# Altium PCB PCB_Ball.PcbDoc
Units mm, origin at the board's own origin, x right, y up, seen from the top; angles counter-clockwise.
Board outline 42.4 x 41.6 mm, 2 copper layers (Top Layer, Bottom Layer), stack 1.671 mm thick; 26 components, 18 nets, 146 pads, 69 vias.
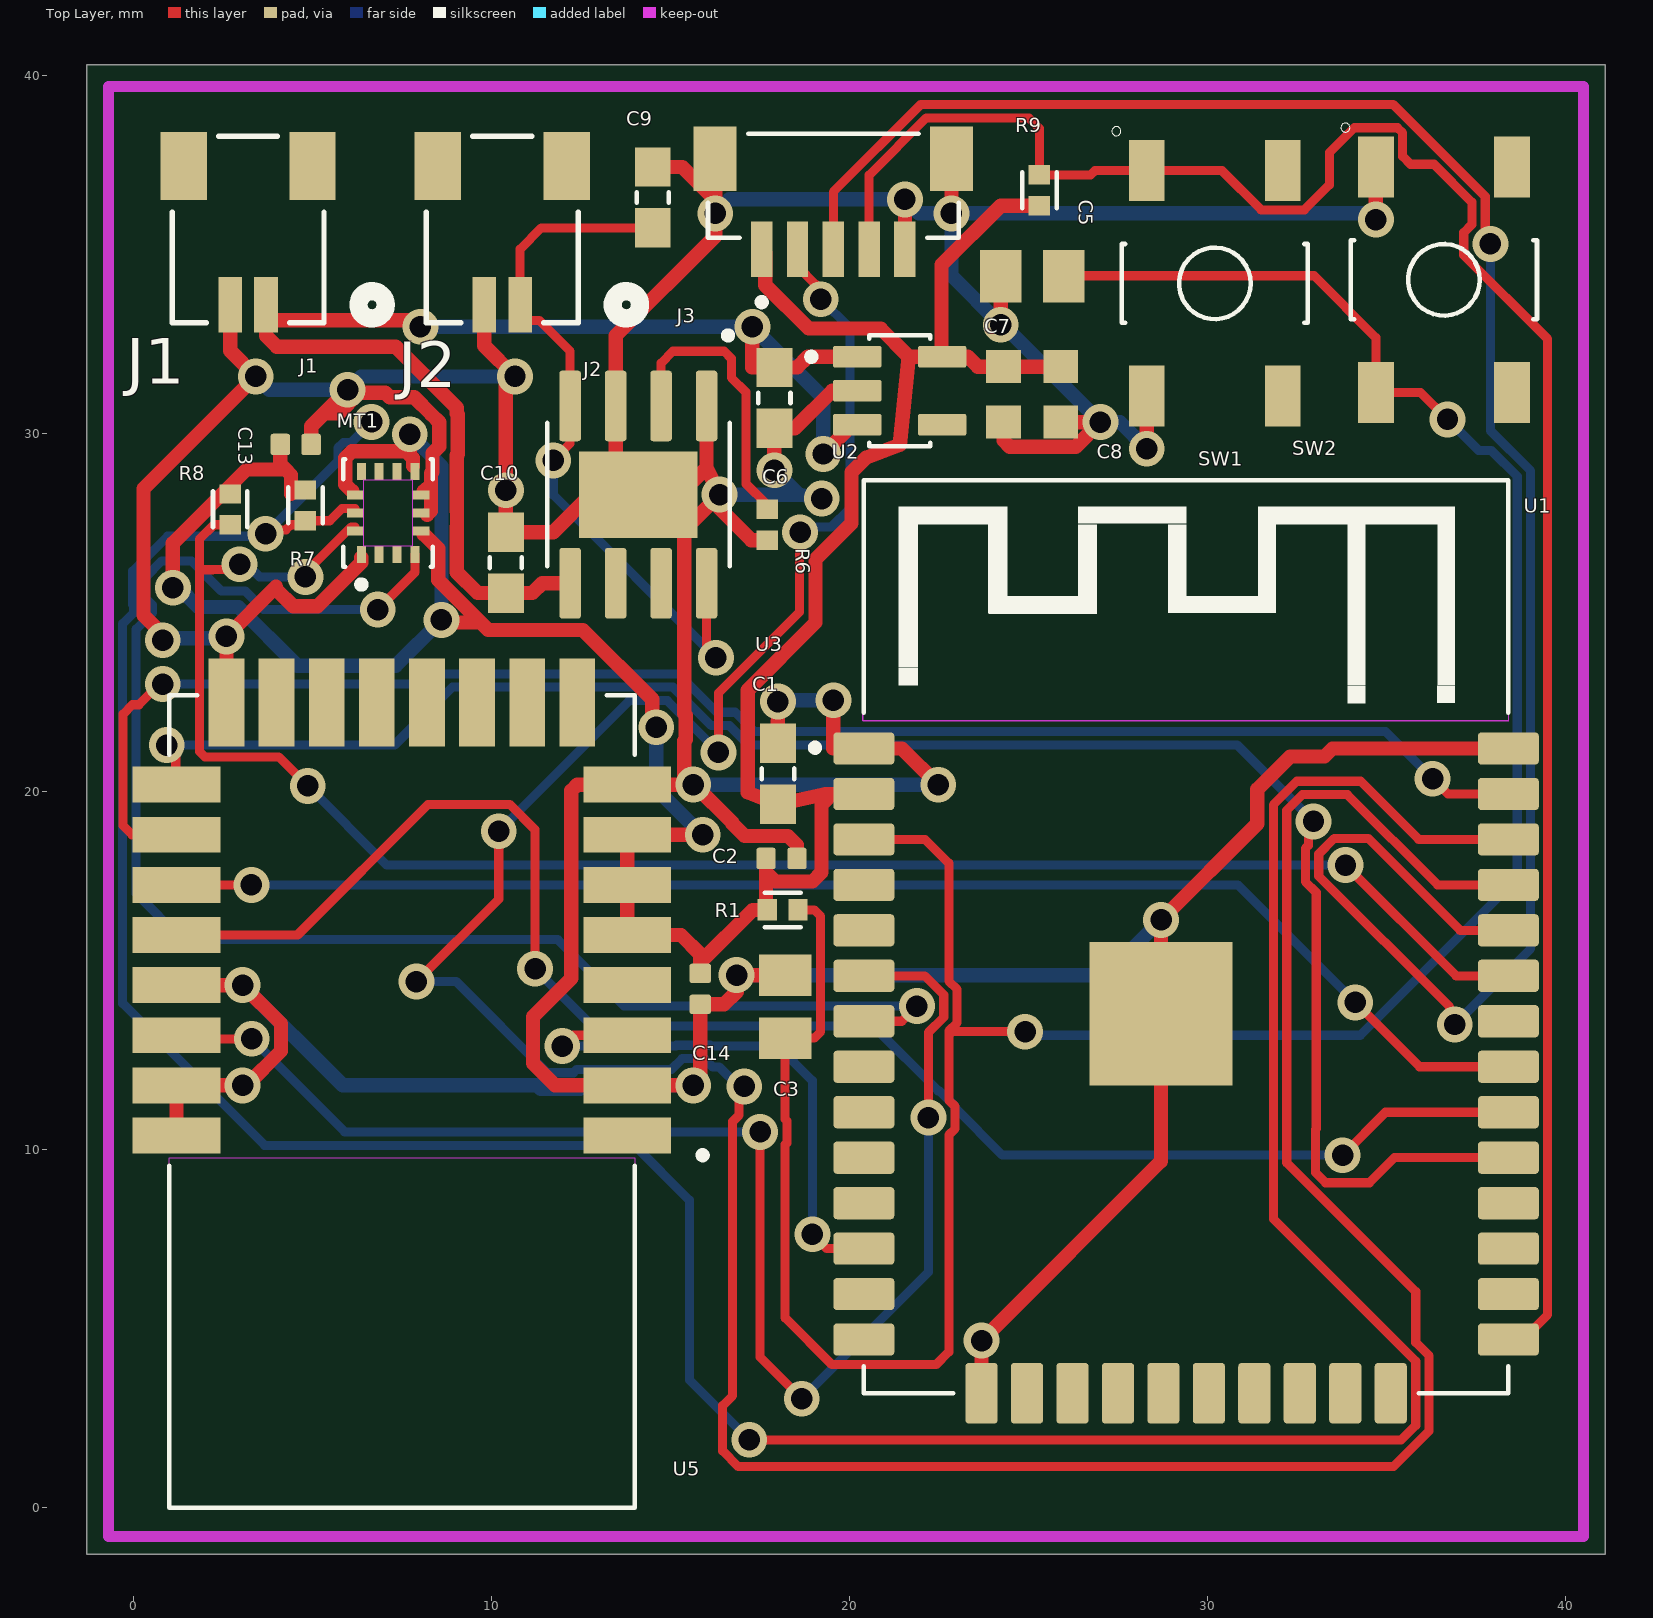
[diagram p0: Top Layer view]
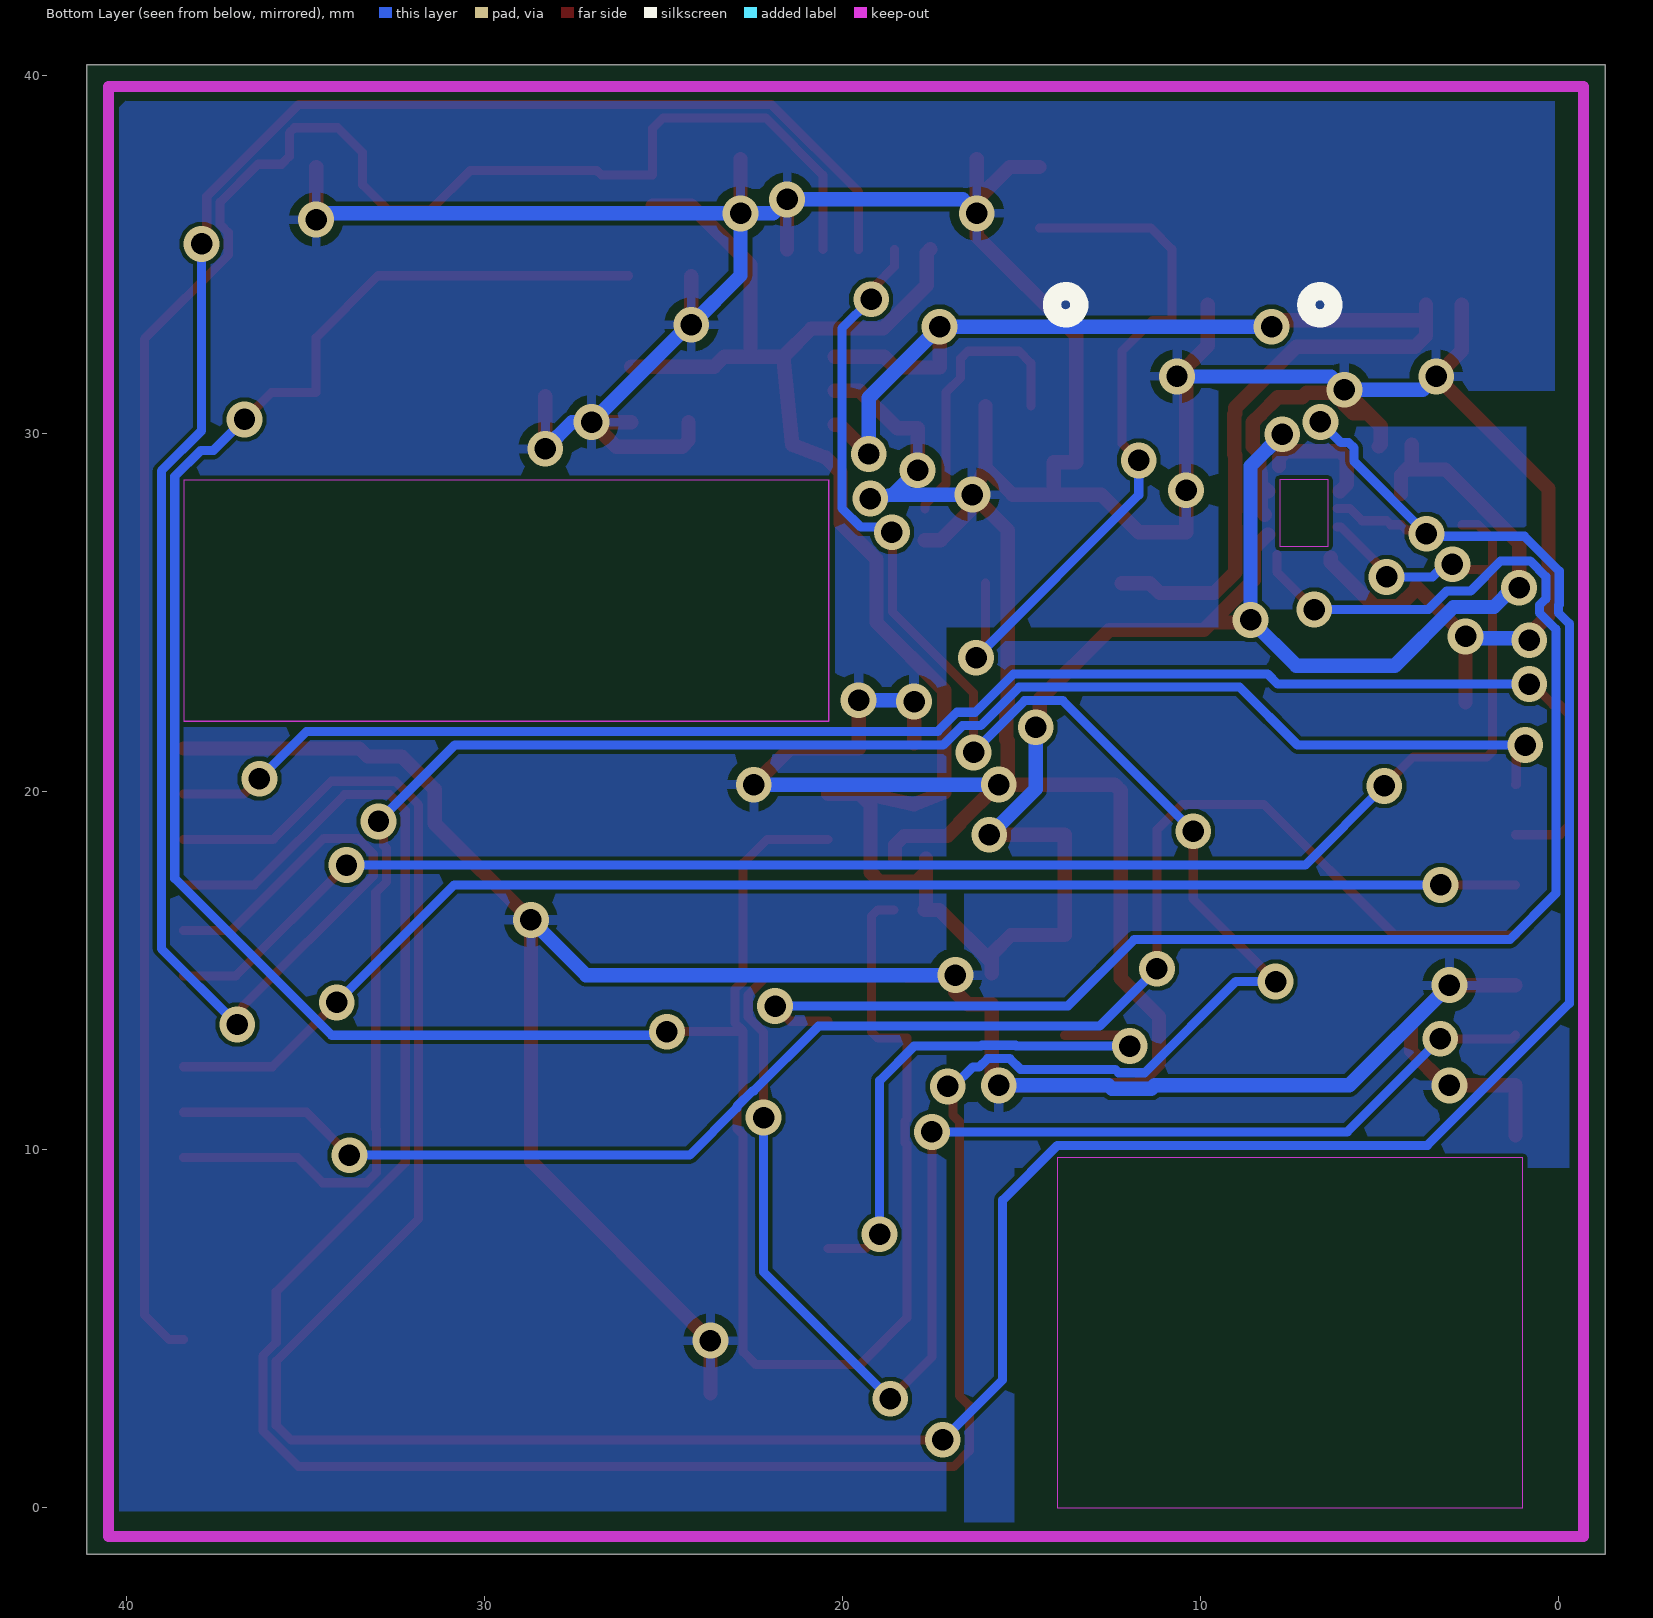
[diagram p1: Bottom Layer view, seen from below]
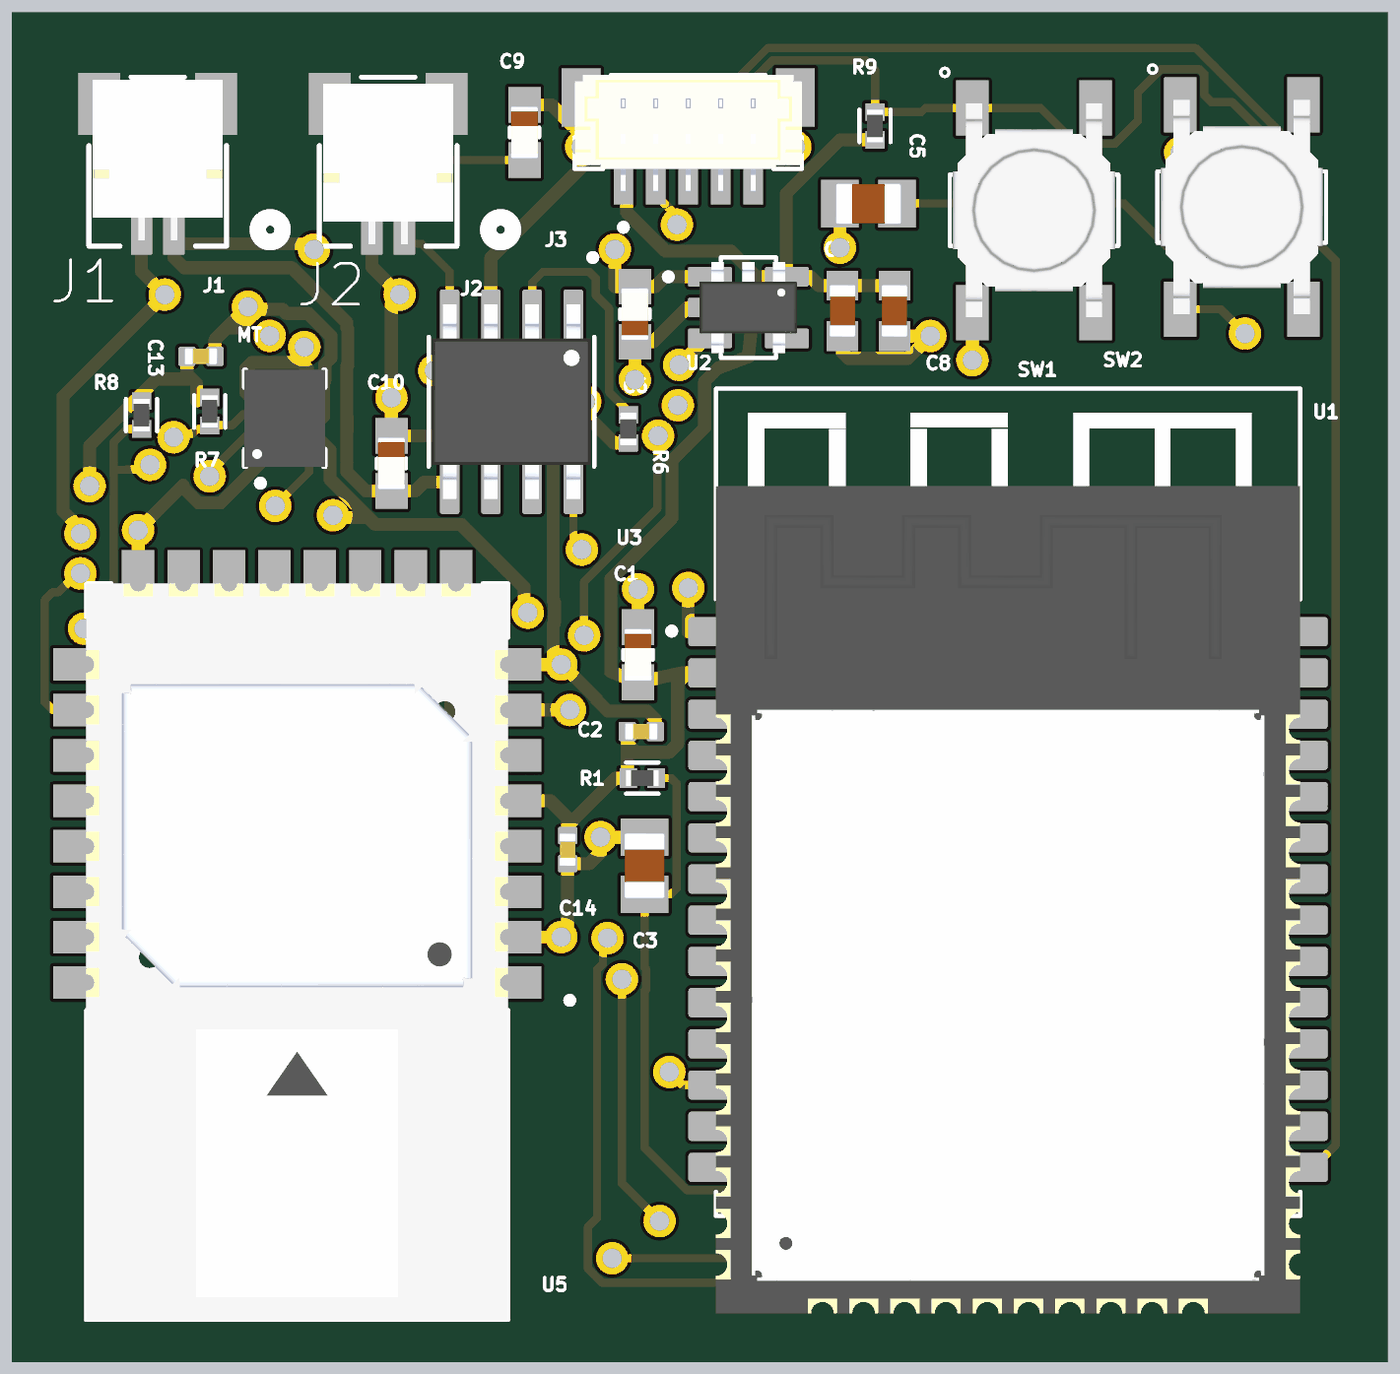
[diagram p2: 3D render of the assembled board from above, using the file's embedded part models]

## Layer stack, top to bottom
Top Solder: solder mask 0.0102, Solder Resist, Dk 3.5
Top Layer: signal copper 0.0356
Dielectric1: core 1.6, FR-4, Dk 4.8
Bottom Layer: signal copper 0.0356
Bottom Solder: solder mask 0.0102, Solder Resist, Dk 3.5

## Board outline
-1.3,-1.3 41.1,-1.3 41.1,40.3 -1.3,40.3

## Design rules (kind name [scope] priority, off if disabled: settings)
BoardOutlineClearance [All] p1: gap=0.12 ignorepadtopadclearanceinfootprint=FALSE except(0: Arc-SplitContinuation Track-SplitContinuation SMDPad-SplitContinuation THPad-SplitContinuation Via-SplitContinuation Fill-SplitContinuation Poly-SplitContinuation Region-SplitContinuation Text-SplitContinuation)
Clearance [All vs InNetClass('All Nets')] p1: gap=0.12 ignorepadtopadclearanceinfootprint=FALSE except(0: Arc-Hole Track-Hole SMDPad-Hole THPad-Hole Via-Hole Fill-Hole Poly-Hole Region-Hole Text-Hole)
DiffPairsRouting DiffPair_USB_DATADiffPairsRouting [InDifferentialPairClass('USB_DATA')] p1: maxlimit=0.254 minlimit=0.254 mostfreqgap=0.254 toplayer_minwidth=0.381 toplayer_maxwidth=1.27 toplayer_prefwidth=1.27 bottomlayer_minwidth=0.381 bottomlayer_maxwidth=1.27 bottomlayer_prefwidth=1.27 maxuncoupledlength=12.7
DiffPairsRouting [All] p2: maxlimit=0.254 minlimit=0.254 mostfreqgap=0.254 toplayer_minwidth=0.381 toplayer_maxwidth=0.381 toplayer_prefwidth=0.381 bottomlayer_minwidth=0.381 bottomlayer_maxwidth=0.381 bottomlayer_prefwidth=0.381 maxuncoupledlength=12.7
HoleSize HoleSize_1 [InPadClass('Mounting_Holes')] p1: absolutevalues=TRUE maxlimit=3 minlimit=0.025 maxpercent=80.000 minpercent=20.000
HoleSize Mounting_Holes [All] p2: absolutevalues=TRUE maxlimit=2.54 minlimit=0.025 maxpercent=80.000 minpercent=20.000
MatchedLengths DiffPair_USB_DATAMatchedLengths [InDifferentialPairClass('USB_DATA')] p1: tolerance=3.048 checknetsindiffpair=TRUE checkdiffpairvsdiffpair=FALSE checkxsignals=FALSE checkothers=FALSE
MinimumSolderMaskSliver [All] p1: minsoldermaskwidth=0
PolygonConnect [All] p1: connectstyle=Relief reliefconductorwidth=0.254 reliefentries=4 polygonreliefangle="90 Angle" airgapwidth=0.254
RoomDefinition U_ESP32_Module [InComponentClass('U_ESP32_Module')] p1: confinementstyle=ConfineIn formatcopy=TRUE lockcomponents=FALSE outline 0,39.4 0,31.096 9.448,31.096 9.448,24.5 12.331,24.501 17.02,24.502 17.02,-0.2 40.3,-0.2 40.3,39.4
RoomDefinition U_DWM3000TR13 [InComponentClass('U_DWM3000TR13')] p2: confinementstyle=ConfineIn formatcopy=TRUE lockcomponents=FALSE outline -0.5,-0.5 16.7,-0.5 16.7,24.3 -0.5,24.3
RoomDefinition U_ICM-42670-P_IMU [InComponentClass('U_ICM-42670-P_IMU')] p3: confinementstyle=ConfineIn formatcopy=TRUE lockcomponents=FALSE outline 0.8,25 9,25 9,30.289 0.8,30.289
RoutingVias [All] p1: holewidth=0.6 width=1 viastyle="Through Hole" minholewidth=0.6 minwidth=1 maxholewidth=0.711 maxwidth=1.27
ShortCircuit ShortCircuit_ADG [InNet('AGND') vs InNet('DGND')] p1 off: allowed=TRUE
ShortCircuit [All] p2: allowed=FALSE
SilkToSolderMaskClearance SilkscreenOverComponentPads [IsPad] p1 off: minsilkscreentomaskgap=0.254 clearancetoexposedcopper=TRUE
SolderMaskExpansion [All] p1: expansion=0.102 istentingtop=FALSE
SupplyNets "Schematic Supply Nets_3" [InNet('+3.3V')] p1: voltage=0.000
SupplyNets "Schematic Supply Nets_1" [InNet('GND')] p2: voltage=0.000
Width Width_Power [InNetClass('Power')] p1: maxlimit=0.6 minlimit=0.3 preferedwidth=0.4 minimp=50.000000 maximp=50.000000 favimp=50.000000
Width [All] p2: maxlimit=0.254 minlimit=0.254 preferedwidth=0.254
25 further rules are at their usual default settings.

## Classes and differential pairs
net class Power: +3.3V GND V_BAT
component class U_ICM-42670-P_IMU: C13 MT1 R7 R8
component class U_ESP32_Module: C1 C2 C3 C5 C6 C7 C8 C9 C10 J1 J2 J3 R1 R6 R9 SW1 SW2 U1 U2 U3
component class U_DWM3000TR13: C14 U5

## Components (designator, comment, footprint, x,y, rotation, side; value= is the part's Value field where it differs from the comment)
C1 "Cap" CAPC1608X90 18,20.5 r270 top value=10uF
C2 "Cap" CAPC1005X55N 18.099,18.137 r180 top value=100nF
C3 "Cap" CAPC2012X94N 18.2,14 r270 top value=0.1uF/50V(10%)
C5 "Cap" CAPC2012X94N 25.1,34.4 r0 top value=0.1uF/50V(10%)
C6 "Cap" CAPC1608X90 17.9,31 r90 top value=10uF
C7 "Cap" CAPC1608X87N 24.3,31.1 r90 top value=10nF
C8 "Cap" CAPC1608X87N 25.9,31.1 r90 top value=10nF
C9 "Cap" CAPC1608X90 14.5,36.6 r270 top value=10uF
C10 "Cap" CAPC1608X90 10.4,26.4 r270 top value=10uF
C13 "Cap" CAPC1005X55N 4.532,29.7 r180 top value=100nF
C14 "Cap" CAPC1005X55N 15.83,14.495 r90 top value=100nF
J1 "SM02B-SRSS-TB (LF)(SN)" CONN_SM02B-SRSS-TB_JST 3.2,35.7 r0 top
J2 "SM02B-SRSS-TB (LF)(SN)" CONN_SM02B-SRSS-TB_JST 10.3,35.7 r0 top
J3 "BM05B-SRSS-TB(LF)(SN)" JST_BM05B-SRSS-TB(LF)(SN) 19.545,36.925 r0 top
MT1 "ICM-42670-P" XDCR_ICM-42670-P 7.113,27.789 r90 top
R1 "Res1" RESC1005X40 18.13,16.7 r180 top value="10k (5%)"
R6 "Res1" RESC1005X40N 17.697,27.462 r90 top value=2.4k
R7 "Res1" RESC1005X40 4.8,28 r90 top value=4.7k
R8 "Res1" RESC1005X40 2.7,27.889 r90 top value=4.7k
R9 "Res1" RESC1005X40 25.3,36.8 r270 top value="10k (5%)"
SW1 "SW-PB" SW_TL3342F160QG 30.2,34.2 r270 top
SW2 "SW-PB" SW_TL3342F160QG 36.6,34.3 r270 top
U1 "ESP-WROOM-32" MODULE_ESP-WROOM-32 29.4,12.955 r0 top
U2 "AP2112K-3.3TRG1" SOT95P285X140-5N 21.4,31.2 r0 top
U3 "TP4056" SOP127P600X175-9N 14.1,28.3 r270 top
U5 "DWM3000TR13" XCVR_DWM3000TR13 7.495,11.35 r180 top

## Footprints (in the part's own frame and the unit in brackets; to place one, negate y for a bottom-side part, rotate by r counter-clockwise, add the part's x,y. Pads: shape width x height; smd on the part's side, far side on the other; paste and mask are expansions set on the pad)
CAPC1005X55N [mm]
  rrect25% 0.54x0.6 smd: 1(-0.432,0) 2(0.432,0)
  body extent -0.5,-0.25 0.5,0.25, height 0.55
CAPC1608X87N [mm]
  rect 0.92x0.97 smd: 1(-0.775,0) 2(0.775,0)
  body extent -0.8,-0.4 0.8,0.4, height 0.87
CAPC1608X90 [mm]
  rect 1.1x1 smd: 1(-0.85,0) 2(0.85,0)
  silkscreen extent -0.15,-0.45 0.15,0.45, body extent -0.8,-0.43 0.8,0.43, height 1
CAPC2012X94N [mm]
  rect 1.16x1.47 smd: 1(-0.88,0) 2(0.88,0)
  body extent -1,-0.63 1,0.63, height 0.94
CONN_SM02B-SRSS-TB_JST [mil]
  rect 26x61 smd paste+0 mask+0: 1(19.69,-82.62) 2(-19.68,-82.62)
  rect 51x75 smd paste+0 mask+0: 3(-70.87,69.94) 4(70.87,69.94)
  silkscreen extent -84,-103 151,102, body extent -79,-95 79,99, height 128
JST_BM05B-SRSS-TB(LF)(SN) [mm]
  rect 0.6x1.55 smd: 1(-2,-1.775) 2(-1,-1.775) 3(0,-1.775) 4(1,-1.775) 5(2,-1.775)
  rect 1.2x1.8 smd: S1(-3.3,0.75) S2(3.3,0.75)
  silkscreen extent -3.5,-3.35 3.5,1.45, body extent -3.5,-2.15 3.5,1.45, height 4.25
MODULE_ESP-WROOM-32 [mm]
  rrect22% 1.7x0.9 smd: 1(-9,8.255) 2(-9,6.985) 3(-9,5.715) 4(-9,4.445) 5(-9,3.175) 6(-9,1.905) 7(-9,0.635) 8(-9,-0.635) 9(-9,-1.905) 10(-9,-3.175) 11(-9,-4.445) 12(-9,-5.715) 13(-9,-6.985) 14(-9,-8.255) 25(9,-8.255) 26(9,-6.985) 27(9,-5.715) 28(9,-4.445) 29(9,-3.175) 30(9,-1.905) 31(9,-0.635) 32(9,0.635) 33(9,1.905) 34(9,3.175) 35(9,4.445) 36(9,5.715) 37(9,6.985) 38(9,8.255)
  rect 4x4 smd: 1.1(-0.7,0.845)
  rrect22% 0.9x1.7 smd: 15(-5.715,-9.755) 16(-4.445,-9.755) 17(-3.175,-9.755) 18(-1.905,-9.755) 19(-0.635,-9.755) 20(0.635,-9.755) 21(1.905,-9.755) 22(3.175,-9.755) 23(4.445,-9.755) 24(5.715,-9.755)
  Keep-Out Layer region: 9,9.026 -9.026,9.026 -9.026,15.75 9,15.75
  Keep-Out Layer region: 9,9.012 -9.012,9.012 -9.012,15.75 9,15.75
  silkscreen extent -10.46,-9.75 9,15.75, body extent -9,-12.75 9,12.75, height 3.25
RESC1005X40 [mm]
  rect 0.54x0.6 smd: 1(-0.43,0) 2(0.43,0)
  silkscreen extent -0.5,-0.48 0.5,0.48, body extent -0.5,-0.25 0.5,0.25, height 0.4
RESC1005X40N [mm]
  rect 0.54x0.6 smd: 1(-0.432,0) 2(0.432,0)
  body extent -0.5,-0.25 0.5,0.25, height 0.4
SOP127P600X175-9N [mm]
  rrect25% 1.97x0.6 smd: 1(-2.475,1.905) 2(-2.475,0.635) 3(-2.475,-0.635) 4(-2.475,-1.905) 5(2.475,-1.905) 6(2.475,-0.635) 7(2.475,0.635) 8(2.475,1.905)
  rect 2.413x3.302 smd paste-3: 9(0,0)
  silkscreen extent -4.54,-2.55 2,2.6, body extent -3,-2.45 3,2.45, height 1.75
SOT95P285X140-5N [mm]
  rrect15% 1.35x0.6 smd: 1(-1.185,0.95) 2(-1.185,0) 3(-1.185,-0.95) 4(1.185,-0.95) 5(1.185,0.95)
  silkscreen extent -2.57,-1.55 0.85,1.55, body extent -1.5,-1.4 1.5,1.4, height 1.4
SW_TL3342F160QG [mm]
  rect 1.7x1 smd paste+0 mask+0.102: 1(-3.15,-1.9) 2(3.15,-1.9) 3(-3.15,1.9) 4(3.15,1.9)
  silkscreen extent -4.38,-2.88 1.1,2.6, body extent -3.3,-2.5 3.3,2.5, height 1.46
XCVR_DWM3000TR13 [mm]
  rect 2.45x1 smd: 1(-6.295,0.95) 2(-6.295,-0.45) 3(-6.295,-1.85) 4(-6.295,-3.25) 5(-6.295,-4.65) 6(-6.295,-6.05) 7(-6.295,-7.45) 8(-6.295,-8.85) 17(6.295,-8.85) 18(6.295,-7.45) 19(6.295,-6.05) 20(6.295,-4.65) 21(6.295,-3.25) 22(6.295,-1.85) 23(6.295,-0.45) 24(6.295,0.95)
  rect 1x2.45 smd: 9(-4.9,-11.145) 10(-3.5,-11.145) 11(-2.1,-11.145) 12(-0.7,-11.145) 13(0.7,-11.145) 14(2.1,-11.145) 15(3.5,-11.145) 16(4.9,-11.145)
  Keep-Out Layer region: 6.5,1.575 -6.5,1.575 -6.5,11.35 6.5,11.35
  Keep-Out Layer region: 6.5,1.575 -6.5,1.575 -6.5,11.35 6.5,11.35
  silkscreen extent -8.5,-11.35 6.5,11.35, body extent -6.5,-11.35 6.5,11.35, height 2.89
XDCR_ICM-42670-P [mm]
  rect 0.475x0.25 smd paste-1 mask+0.05: 1(-1.163,0.75) 2(-1.163,0.25) 3(-1.163,-0.25) 4(-1.163,-0.75) 8(1.162,-0.75) 9(1.162,-0.25) 10(1.162,0.25) 11(1.162,0.75)
  rect 0.25x0.475 smd paste-1 mask+0.05: 5(-0.5,-0.913) 6(0,-0.913) 7(0.5,-0.913) 12(0.5,0.913) 13(0,0.913) 14(-0.5,0.913)
  Keep-Out Layer region: 0.925,-0.675 -0.925,-0.675 -0.925,0.675 0.925,0.675
  silkscreen extent -2.1,-1.25 1.5,1.25, body extent -1.5,-1.25 1.5,1.25, height 0.81

## Part data
C1 C2 C3 C5 C6 C7 C8 C9 C10 C13 C14: "Capacitor", LatestRevisionDate=17-Jul-2002, LatestRevisionNote="Re-released for DXP Platform.", PackageDescription="Radial Cap, Thru-Hole; 2 Leads; 0.3 in Pin Spacing", PackageReference=RAD-0.3, Published=8-Jun-2000, Publisher="Altium Limited"
J1 J2: library part "SM02B-SRSS-TB LFSN", "Description", Manufacturer_Name=JST, Copyright="Copyright (C) 2026 Ultra Librarian. All rights reserved.", Manufacturer_Part_Number="SM02B-SRSS-TB (LF)(SN)", RefDes=RefDes, Type=Type
J3 MT1: Package=None, Availability=Unavailable, Price=None
  J3: MP=BM05B-SRSS-TB(LF)(SN)
  MT1: MP=ICM-42670-P
R1 R6 R7 R8 R9: "Resistor", LatestRevisionDate=17-Jul-2002, LatestRevisionNote="Re-released for DXP Platform.", PackageDescription="Axial Device, Thru-Hole; 2 Leads; 0.3 in Pin Spacing", PackageReference=AXIAL-0.3, Published=8-Jun-2000, Publisher="Altium Limited"
SW1 SW2: "Switch", LatestRevisionDate=17-Jul-2002, LatestRevisionNote="Re-released for DXP Platform.", PackageDescription="Switch; 2 Leads", PackageReference=SPST-2, Published=24-Mar-1999, Publisher="Altium Limited"
U1: "Transceptor serie ESP-WROOM-32; Placa de evaluaciÃ³n 802.11 b/g/n (Wi-Fi, WiFi, WLAN), BluetoothÂ® Smart 4.x de bajo consumo (BLE)", Package="Module Espressif Systems", Check_prices=https://www.snapeda.com/parts/ESP-WROOM-32/Espressif+Systems/view-part/?ref=eda, MF="Espressif Systems", MP=ESP-WROOM-32, SnapEDA_Link=https://www.snapeda.com/parts/ESP-WROOM-32/Espressif+Systems/view-part/?ref=snap
U2: "Linear Voltage Regulator IC Positive Fixed 1 Output 600mA SOT-25", Package="SOT-753 Diodes Inc.", Availability="In Stock", Check_prices=https://www.snapeda.com/parts/AP2112K-3.3TRG1/Diodes+Inc./view-part/?ref=eda, MF="Diodes Inc.", MP=AP2112K-3.3TRG1, Price=None, Purchase-URL=https://pricing.snapeda.com/search/part/AP2112K-3.3TRG1/?ref=eda, SnapEDA_Link=https://www.snapeda.com/parts/AP2112K-3.3TRG1/Diodes+Inc./view-part/?ref=snap
U3: "Complete single cell Li-Ion battery with a constant current / constant voltage linear charger", Package=Package, Availability="Not in stock", Check_prices=https://www.snapeda.com/parts/TP4056/NanJing+Top+Power+ASIC+Corp./view-part/?ref=eda, MF="NanJing Top Power ASIC Corp.", MP=TP4056, Price=None, SnapEDA_Link=https://www.snapeda.com/parts/TP4056/NanJing+Top+Power+ASIC+Corp./view-part/?ref=snap
U5: "802.15.4, Bluetooth, Cellular UWB, ZigbeeÂ® Transceiver Module 6.25GHz ~ 8.25GHz Integrated, Ceramic Patch Surface Mount", Package=None, Check_prices=https://www.snapeda.com/parts/DWM3000TR13/Qorvo/view-part/?ref=eda, MF=Qorvo, MP=DWM3000TR13, SnapEDA_Link=https://www.snapeda.com/parts/DWM3000TR13/Qorvo/view-part/?ref=snap

## Via types
v1: diameter 1, hole 0.6, Top Layer to Bottom Layer, 69 vias

## Nets (pads, with @x,y where several pads share a name; then routed paths per layer and width w, separated by ;. In a path a pad name is that pad's centre, name@x,y a point inside that pad or via, vN(x,y) a via of type N, cw(c..) or ccw(c..) an arc to the next point about the centre after c; other vN are vias at no path point)
+3.3V: C1.2 C2.2 C7.2 C8.2 C13.2 C14.2 J3.1 MT1.5 MT1.8 MT1.12 R1.2 R7.2 R8.2 R9.2 U1.2 U2.5 U5.5 U5.6 U5.7 | length 88.9
  Top Layer w0.4: v1(1.1,25.7) 1.1,26.943 3.157,29 4.25,29 ; C13.2 4.1,29.15 4.25,29 ; 4.4,28.319 4.4,28.85 4.25,29 ; MT1.12@6.118,28.394 6.105,28.394 5.917,28.581 5.917,29.321 6.105,29.509 6.62,29.509 7.62,29.509 7.714,29.415 ; v1(7.716,29.984) 7.714,29.982 7.714,29.415 ; MT1.8@7.807,29.1 7.807,29.321 7.714,29.415 ; MT1.5@8.108,27.184 8.12,27.184 8.51,26.794 8.51,25.917 9.7,24.726 ; v1(8.6,24.8) 8.674,24.726 9.7,24.726 ; v1(14.6,21.8) 14.485,21.915 14.485,22.582 12.548,24.52 9.906,24.52 9.7,24.726 ; C14.2 15.83,15.235 ; v1(15.9,18.8) U5.7 U5.6 U5.5 15.294,16 15.83,15.464 15.83,15.235 ; J3.1 17.645,35.05 17.645,34.149 18.857,32.937 20.866,32.937 21.654,32.15 ; C2.2 17.667,17.75 ; R1.2 R1.2@17.667,16.7 ; U1.2 19.52,19.94 ; R9.2 24.221,36.37 22.568,34.717 U2.5@22.568,32.15 ; C8.2 25.083,31.875 C7.2 23.58,31.875 23.305,32.15 U2.5 U2.5@22.568,32.15 ; 15.83,15.235 17.294,16.7 R1.2@17.667,16.7 ; R1.2@17.667,16.7 17.667,17.75 ; 17.667,17.75 17.921,17.496 18.961,17.496 19.215,17.75 19.215,19.635 19.52,19.94 ; 19.52,19.94 19.327,19.94 C1.2 17.158,19.98 17.158,22.837 19.047,24.727 19.047,26.497 20.053,27.504 20.053,28.926 20.46,29.332 21.4,29.688 21.654,32.15 ; 21.654,32.15 U2.5@22.568,32.15
  Bottom Layer w0.4: v1(1.1,25.7) 1.262,25.7 1.802,25.16 2.935,25.16 4.575,23.52 7.32,23.52 v1(8.6,24.8) 8.6,29.1 v1(7.716,29.984) ; v1(14.6,21.8) 14.6,20.075 15.875,18.8 v1(15.9,18.8)
EN: C3.2 C5.2 R1.1 SW2.2 U1.3 | length 79.6
  Top Layer w0.254: C3.2 18.199,10.857 18.247,10.809 18.247,10.191 18.199,10.143 18.199,5.309 19.506,4.003 22.42,4.003 22.771,4.354 22.771,10.415 22.947,10.591 22.947,11.209 22.771,11.385 22.771,13.2 ; C3.2 19.012,13.12 19.19,13.298 19.19,16.522 19.012,16.7 R1.1 ; U1.3 22.105,18.67 22.771,18.004 22.771,14.713 23.003,14.481 23.003,13.552 22.771,13.32 22.771,13.3 22.771,13.2 ; v1(24.9,13.3) 22.871,13.3 22.771,13.2 ; C5.2 25.98,34.412 32.973,34.412 34.7,32.685 SW2.2 35.95,31.15 v1(36.7,30.4)
  Bottom Layer w0.254: v1(24.9,13.3) 25,13.2 34.264,13.2 38.647,17.583 38.647,28.807 37.922,29.532 37.568,29.532 v1(36.7,30.4)
GND: C1.1 C2.1 C3.1 C5.1 C6.1 C7.1 C8.1 C9.1 C10.1 C13.1 C14.1 J1.2 J2.2 J3.5 J3.S1 J3.S2 MT1.1 MT1.6 MT1.7 R6.1 SW1.2 SW2.1 U1.1 U1.1.1 U1.15 U1.38 U2.2 U3.1 U3.3 U3.9 U5.2 U5.8 U5.16 U5.21 U5.23 U5.24 | length 226.5
  Top Layer w0.4: v1(0.818,24.23) 0.818,24.392 0.28,24.93 0.28,28.464 v1(3.416,31.601) 2.7,32.317 J1.2 ; U5.24 U5.23 3.16,11.8 4.12,12.76 4.12,13.525 v1(3.045,14.6) U5.21 ; U5.16 v1(2.595,24.34) 3.98,25.725 3.98,25.66 4.46,25.18 5.14,25.18 6.362,26.403 MT1.1@6.362,26.544 ; C13.1@5.02,29.644 C13.1 4.964,30.21 5.327,30.573 ; v1(5.98,31.226) 5.327,30.573 ; MT1.7@8.108,28.394 8.12,28.394 8.308,28.581 ; MT1.6@8.2,27.734 8.308,27.841 8.308,28.581 ; J2.2 9.8,32.456 v1(10.655,31.601) 10.4,31.345 v1(10.4,28.42) C10.1 11.722,27.25 12.772,28.3 U3.9 ; C9.1 15.329,37.45 v1@16.245,36.534 ; U3.1 16.005,29.053 ; J3.S1 v1@16.245,36.534 ; R6.1 17.251,27.03 16.371,27.91 v1(16.371,28.3) ; v1(17.9,28.98) C6.1 18.47,30.15 19.52,31.2 U2.2 ; C1.1 17.996,21.35 17.996,21.966 18,21.97 v1(18,22.52) ; C3.1 v1(16.845,14.88) 16.845,14.415 16.494,14.063 C14.1 15.83,11.995 v1(15.635,11.8) U5.2 11.772,11.8 11.156,12.416 11.156,13.719 12.23,14.793 12.23,20.036 12.394,20.2 U5.8 v1(15.635,20.2) ; C2.1 18.531,18.512 18.277,18.766 17.069,18.766 16.72,19.115 16.72,19.14 15.66,20.2 v1(15.635,20.2) ; v1(19.547,22.559) 19.547,21.21 U1.1 21.46,21.21 v1(22.476,20.194) ; J3.5 v1(21.545,36.545) ; v1(22.845,36.155) J3.S2 ; U1.15 v1(23.685,4.67) 28.7,9.685 U1.1.1 v1(28.7,16.42) 31.389,19.109 31.389,20.066 32.308,20.985 33.265,20.985 33.49,21.21 U1.38 ; v1(24.22,33.045) C5.1 ; C7.1 24.3,29.81 24.473,29.637 26.317,29.637 v1(27.005,30.325) 26.456,30.325 26.454,30.323 25.9,30.323 C8.1 ; v1(28.3,29.58) SW1.2 ; v1(34.7,35.98) SW2.1 ; 5.327,30.573 5.735,30.573 6.31,31.149 7.032,31.149 7.16,31.02 7.84,31.02 8.32,30.54 8.536,30.324 8.536,29.645 8.349,29.458 8.349,28.938 8.308,28.897 8.308,28.581 ; U3.9 15.252,28.3 16.005,29.053 ; U3.9 14.1,29.205 13.465,29.205 U3.3 13.465,32.736 16.245,35.516 v1(16.245,36.155) v1@16.245,36.534 ; v1(15.635,20.2) 15.38,20.455 15.38,21.42 15.42,21.46 15.42,22.14 15.38,22.18 15.38,27.309 v1(16.371,28.3) ; 16.005,29.053 v1(16.371,28.3)
  Bottom Layer w0.4: v1(0.818,24.23) 0.873,24.285 2.54,24.285 v1(2.595,24.34) ; v1(3.045,14.6) 5.845,11.8 11.28,11.8 11.375,11.705 12.471,11.705 12.566,11.8 v1(15.635,11.8) ; v1(3.416,31.601) 3.791,31.226 v1(5.98,31.226) 6.354,31.601 v1(10.655,31.601) ; v1(15.635,20.2) 22.47,20.2 v1(22.476,20.194) ; v1(16.245,36.155) 16.636,36.545 v1(21.545,36.545) 21.936,36.155 v1(22.845,36.155) ; v1(16.371,28.3) 18.58,28.3 ; v1(16.845,14.88) 27.16,14.88 v1(28.7,16.42) ; v1(17.9,28.98) 18.58,28.3 ; v1(18,22.52) 18.039,22.559 v1(19.547,22.559) ; v1(19.223,28.189) 18.58,28.3 ; v1(28.3,29.58) 27.555,30.325 v1(27.005,30.325) 24.285,33.045 v1(24.22,33.045) 22.845,34.42 v1(22.845,36.155) ; v1(34.7,35.98) 34.525,36.155 v1(22.845,36.155)
  other v1: 3.045,11.8
IO0: J3.4 R9.1 SW1.1 U1.25 | length 57.7
  Top Layer w0.254: J3.4 20.545,37.225 22.143,38.822 25.007,38.822 25.3,38.529 R9.1 26.734,37.23 26.854,37.35 SW1.1 30.401,37.35 31.498,36.253 32.702,36.253 33.4,36.951 33.4,37.849 34.098,38.547 35.302,38.547 35.447,38.402 35.447,37.745 35.666,37.526 36.323,37.526 37.379,36.47 37.379,35.843 37.153,35.617 37.153,34.991 39.497,32.647 39.497,5.397 38.8,4.7 U1.25
NetC9_2: C9.2 J2.1 U3.4 U3.8 | length 20.5
  Top Layer w0.254: v1(11.722,29.256) 12.195,29.729 U3.4 12.195,32.304 11.331,33.168 10.8,33.168 J2.1 10.8,35.158 11.392,35.75 C9.2 ; U3.8 16.005,24.008 v1(16.269,23.744)
  Bottom Layer w0.254: v1(11.722,29.256) 11.722,28.291 v1(16.269,23.744)
NetMT1_4: MT1.4 U1.7 | length 43.1
  Top Layer w0.254: v1(6.821,25.091) 7.863,26.132 MT1.4 ; U1.7 21.456,13.59 v1(21.882,14.016)
  Bottom Layer w0.254: v1(6.821,25.091) 3.636,25.091 3.12,25.607 2.456,25.607 1.616,26.447 0.791,26.447 0.353,26.009 0.353,25.391 0.532,25.211 0.532,25.001 0.071,24.539 0.071,17.158 1.359,15.87 11.849,15.87 13.703,14.016 v1(21.882,14.016)
NetMT1_13: MT1.13 R7.1 U1.36 | length 94.6
  Top Layer w0.254: v1(3.688,27.207) 3.761,27.28 3.98,27.28 4.016,27.316 4.257,27.316 4.4,27.459 4.689,27.459 R7.1 5.481,27.57 5.828,27.917 6.191,27.917 ; v1@6.448,30.329 v1(6.65,30.329) ; v1(17.2,1.9) 35.406,1.9 35.812,2.306 35.812,4.094 31.836,8.07 31.836,19.636 32.493,20.293 34.273,20.293 35.896,18.67 U1.36
  Bottom Layer w0.254: v1(6.65,30.329) 6.074,29.753 5.86,29.753 5.711,29.604 5.711,29.231 v1(3.688,27.207) 3.618,27.137 0.952,27.137 -0.021,26.164 -0.021,25.236 0.004,25.211 0.004,25.001 -0.303,24.694 -0.303,14.092 3.663,10.126 13.993,10.126 15.525,8.594 15.525,3.575 v1(17.2,1.9)
NetMT1_14: MT1.14 R8.1 U1.33 | length 51.3
  Top Layer w0.254: R8.1 2.248,27.459 1.842,27.052 1.842,26.2 ; v1(2.962,26.354) 2.82,26.211 2.22,26.211 2.208,26.2 1.842,26.2 ; v1(4.8,26) 4.8,26.117 6.083,27.4 MT1.14@6.191,27.4 ; v1(4.864,20.163) 4.051,20.976 1.994,20.976 1.842,21.128 1.842,25.385 1.847,25.391 1.847,26.009 1.842,26.015 1.842,26.2 ; v1(33.851,17.953) 36.944,14.86 U1.33
  Bottom Layer w0.254: v1(2.962,26.354) 3.164,26.354 3.518,26 v1(4.8,26) ; v1(4.864,20.163) 7.074,17.953 v1(33.851,17.953)
NetR6_2: R6.2 U3.2 | length 8
  Top Layer w0.254: U3.2 14.735,31.974 15.065,32.304 16.497,32.304 16.701,32.101 16.701,31.568 17.107,31.161 17.107,28.602 17.697,28.012 R6.2
NetU1_6: U1.6 U5.22 | length 40.7
  Top Layer w0.254: U5.22 1.3,13.1 v1(3.3,13.1) ; v1(17.5,10.5) 17.5,4.21 v1(18.663,3.048) ; U1.6 22.095,14.86 22.629,14.326 22.629,13.707 22.2,13.278 v1(22.2,10.9)
  Bottom Layer w0.254: v1(3.3,13.1) 5.9,10.5 v1(17.5,10.5) ; v1(18.663,3.048) 22.2,6.585 v1(22.2,10.9)
NetU1_12: U1.12 U5.3 | length 15.2
  Top Layer w0.254: v1(11.976,12.899) 12.278,13.2 U5.3 ; v1(18.961,7.641) 19.362,7.24 U1.12
  Bottom Layer w0.254: v1(11.976,12.899) 15.148,12.899 15.171,12.921 16.099,12.921 16.122,12.899 17.996,12.899 18.961,11.933 v1(18.961,7.641)
NetU1_29: U1.29 U5.17 | length 51.3
  Top Layer w0.254: v1(0.927,21.306) 1.181,21.052 1.181,20.2 U5.17 ; v1(32.957,19.172) 32.814,19.029 32.814,18.502 32.73,18.418 32.73,17.489 33.033,17.186 33.033,10.597 33.01,10.575 33.01,9.368 33.297,9.081 34.516,9.081 35.216,9.78 U1.29
  Bottom Layer w0.254: v1(0.927,21.306) 7.289,21.306 8.904,22.921 15.064,22.921 16.138,21.847 16.647,21.847 17.188,21.306 30.823,21.306 v1(32.957,19.172)
NetU1_30: U1.30 U5.20 | length 45.6
  Top Layer w0.254: U5.20 4.58,16 8.227,19.647 10.509,19.647 11.214,18.942 v1(11.214,15.058) ; v1(33.769,9.851) 34.969,11.05 U1.30
  Bottom Layer w0.254: v1(11.214,15.058) 12.814,13.457 20.663,13.457 22.473,11.647 22.509,11.647 22.947,11.209 22.947,11.173 24.27,9.851 v1(33.769,9.851)
NetU1_31: U1.31 U5.19 | length 39.3
  Top Layer w0.254: U5.19 v1(3.295,17.4) ; v1(34.125,14.118) 35.923,12.32 U1.31
  Bottom Layer w0.254: v1(3.295,17.4) 30.843,17.4 v1(34.125,14.118)
NetU1_37: U1.37 U5.18 | length 45.3
  Top Layer w0.254: v1(0.818,23.008) 0.726,23.008 0.149,22.431 -0.031,22.431 -0.292,22.17 -0.292,19.054 -0.038,18.8 U5.18 ; v1(36.284,20.366) 36.71,19.94 U1.37
  Bottom Layer w0.254: v1(0.818,23.008) 7.84,23.008 8.127,23.295 15.219,23.295 16.293,22.221 16.802,22.221 17.336,21.687 34.963,21.687 v1(36.284,20.366)
RXD0: J3.3 U1.34 | length 59.3
  Top Layer w0.254: J3.3 19.545,36.754 21.988,39.196 35.182,39.196 37.753,36.625 37.753,35.649 37.9,35.502 v1(37.9,35.3) ; v1(36.9,13.5) 36.757,13.643 36.757,13.991 33.104,17.644 33.104,18.263 33.542,18.7 34.486,18.7 37.056,16.13 U1.34
  Bottom Layer w0.254: v1(36.9,13.5) 39.021,15.621 39.021,28.962 37.9,30.083 v1(37.9,35.3)
TXD0: J3.2 U1.35 | length 97.9
  Top Layer w0.254: v1(7.9,14.7) 10.2,17 v1(10.2,18.9) ; v1(16.338,21.1) 16.338,22.757 18.6,25.019 18.6,27.231 v1(18.617,27.248) ; v1(17.06,11.77) 16.917,11.627 16.917,10.973 16.734,10.79 16.734,3.136 16.453,2.855 16.453,1.591 16.891,1.153 35.188,1.153 36.186,2.151 36.186,4.249 35.812,4.623 35.812,6.037 32.21,9.639 32.21,19.481 32.648,19.919 33.903,19.919 36.422,17.4 U1.35 ; J3.2 18.545,34.675 19.054,34.167 19.054,33.9 v1(19.197,33.757)
  Bottom Layer w0.254: v1(7.9,14.7) 9.012,14.7 11.56,12.152 12.286,12.152 12.381,12.247 15.026,12.247 15.326,12.547 15.944,12.547 16.178,12.314 16.358,12.314 16.901,11.77 v1(17.06,11.77) ; v1(10.2,18.9) 13.847,22.547 14.909,22.547 16.338,21.119 v1(16.338,21.1) ; v1(18.617,27.248) 18.76,27.39 19.481,27.39 20.013,27.923 20.013,32.941 v1(19.197,33.757)
V_BAT: C6.2 C10.2 J1.1 U2.1 U2.3 U3.5 | length 38.7
  Top Layer w0.4: J1.1 J1.1@3.7,33.168 ; v1(8.014,32.99) 7.836,33.168 J1.1@3.7,33.168 ; U3.5 11.413,25.825 11.138,25.55 C10.2 9.612,25.55 9.03,26.132 9.03,27.394 9.034,27.399 9.034,27.83 9.03,27.834 9.03,29.403 9.056,29.429 9.056,30.539 9.03,30.565 9.03,30.729 7.328,32.431 4.005,32.431 3.7,32.736 J1.1@3.7,33.168 ; v1(17.285,32.99) 17.285,31.85 C6.2 18.534,31.85 18.834,32.15 U2.1 ; v1(19.266,29.434) 20.082,30.25 U2.3
  Bottom Layer w0.4: v1(8.014,32.99) v1(17.285,32.99) 19.266,31.009 v1(19.266,29.434)
pads on no net: J1.3 J1.4 J2.3 J2.4 MT1.2 MT1.3 MT1.9 MT1.10 MT1.11 SW1.3 SW1.4 SW2.3 SW2.4 U1.4 U1.5 U1.8 U1.9 U1.10 U1.11 U1.13 U1.14 U1.16 U1.17 U1.18 U1.19 U1.20 U1.21 U1.22 U1.23 U1.24 U1.26 U1.27 U1.28 U1.32 U2.4 U3.6 U3.7 U5.1 U5.4 U5.9 U5.10 U5.11 U5.12 U5.13 U5.14 U5.15

## Polygon pours and split planes (outlines as drawn)
GND on Bottom Layer "GND_L02_P002" (solid, pour order 2): -0.4,24.2 -0.3,24.1 -0.3,-0.4 16.6,-0.4 16.6,24.2
GND on Bottom Layer "GND_L02_P001" (solid, pour order 1): 0.9,30.2 0.9,25.1 8.9,25.1 8.9,30.2
GND on Bottom Layer "GND_L02_P000" (solid, pour order 0): 0.104,39.287 0.1,39.283 0.1,31.2 9.5,31.2 9.5,24.6 17.1,24.6 17.1,-0.1 40.2,-0.1 40.2,39.3

## Keep-outs
Keep-Out Layer:
  lines w0.3: -0.7,-0.8 40.5,-0.8 40.5,39.7 -0.7,39.7 -0.7,-0.8

## Other copper
Multi-Layer:
  pour cut-out: -0.5,9.5 15.2,9.5 15.2,-0.399 -0.5,-0.399
  pour cut-out: 20.2,28.8 20.2,21.8 38.5,21.8 38.5,28.8

## Dimensions
-0.7,-0.8 to 40.5,-0.8 on Mechanical 1
-0.7,39.7 to -0.7,-0.8 on Mechanical 1